# Altium PCB frm-voltrod.PcbDoc (part 1 of 2)
Units mm, origin at the board's own origin, x right, y up, seen from the top; angles counter-clockwise.
Board outline 80 x 200 mm, 2 copper layers (Top Layer, Bottom Layer), stack 1.56 mm thick; 234 components, 176 nets, 667 pads, 121 vias.
Unrouted connection lines stored in the file: 240.
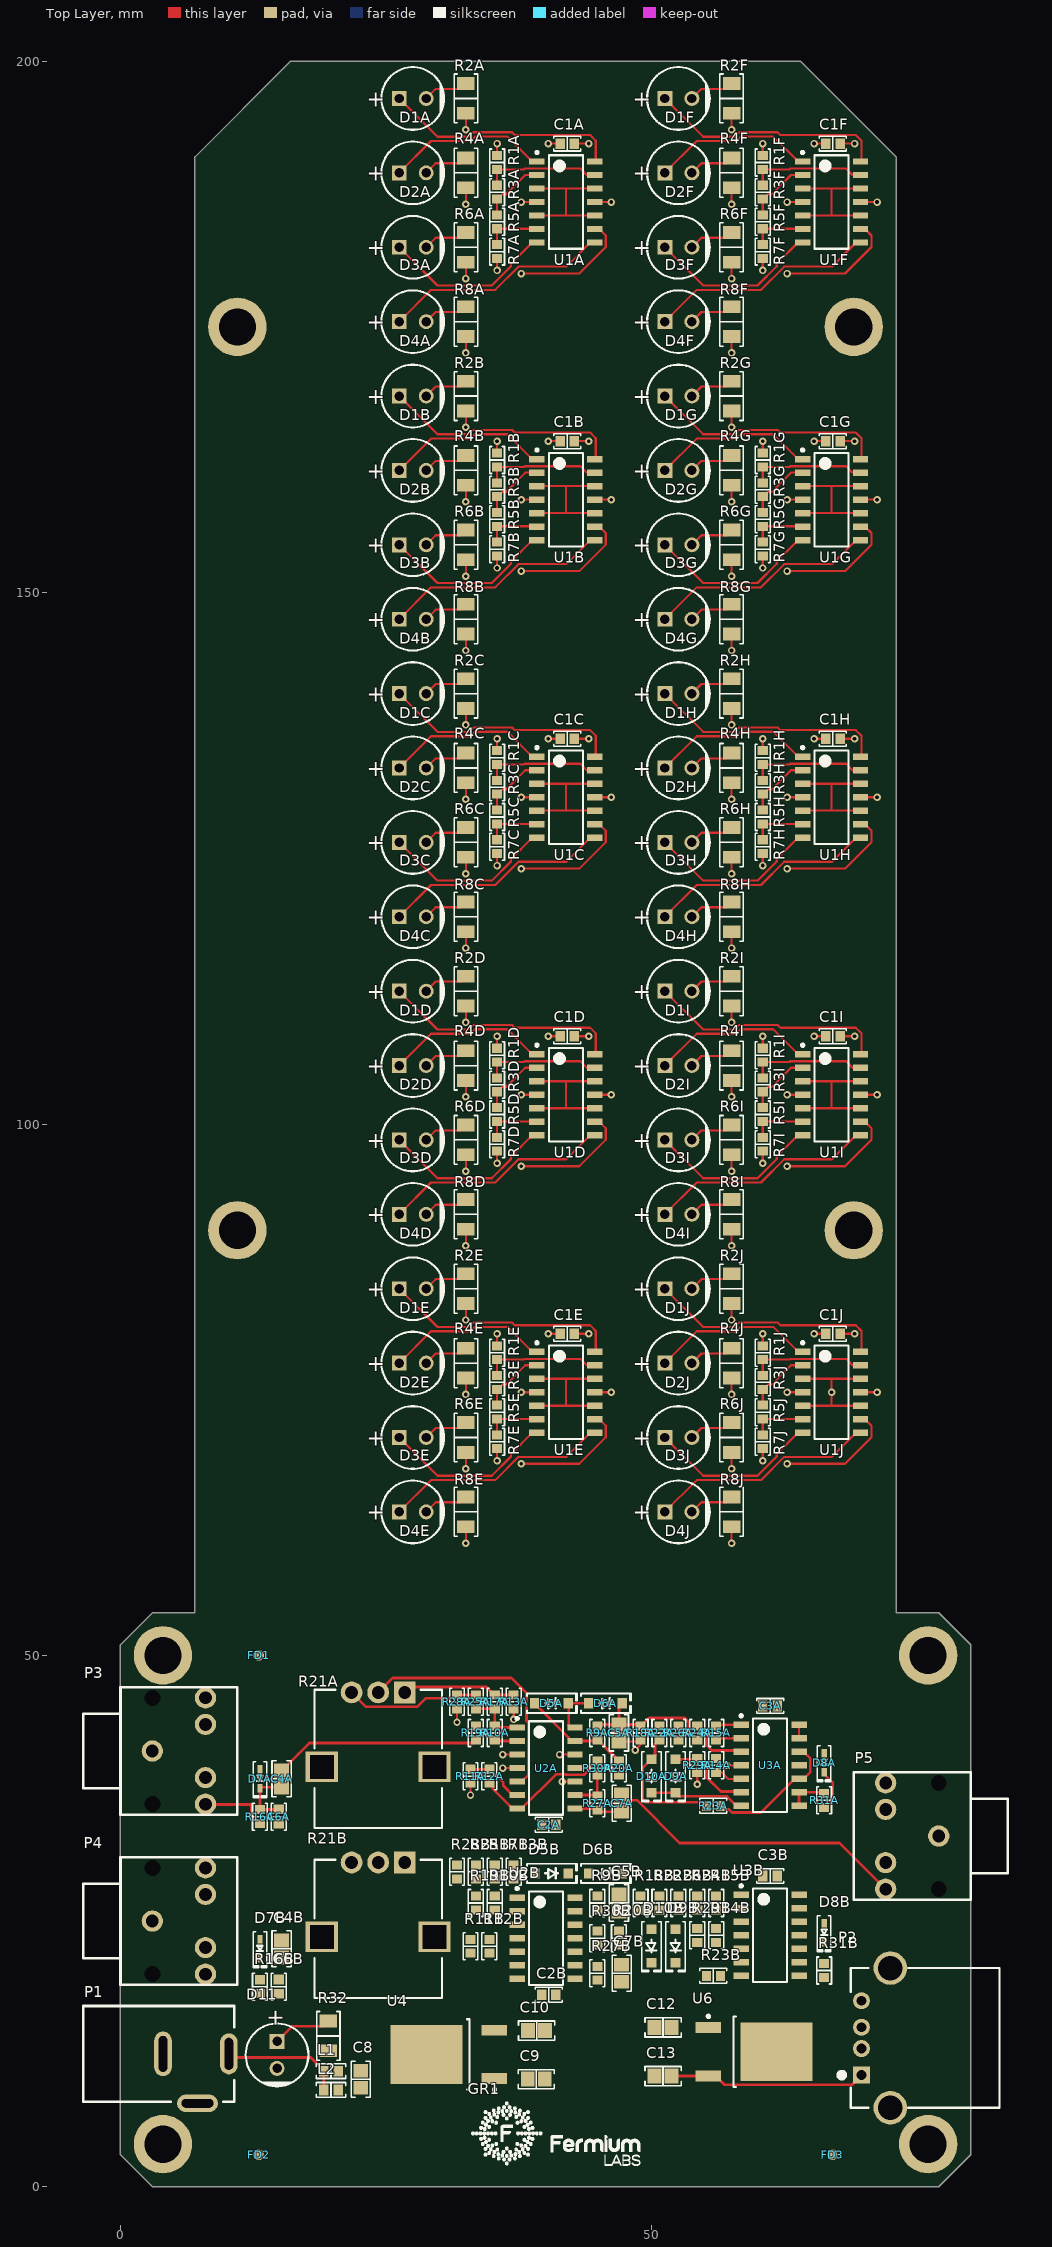
[diagram p0: Top Layer view]
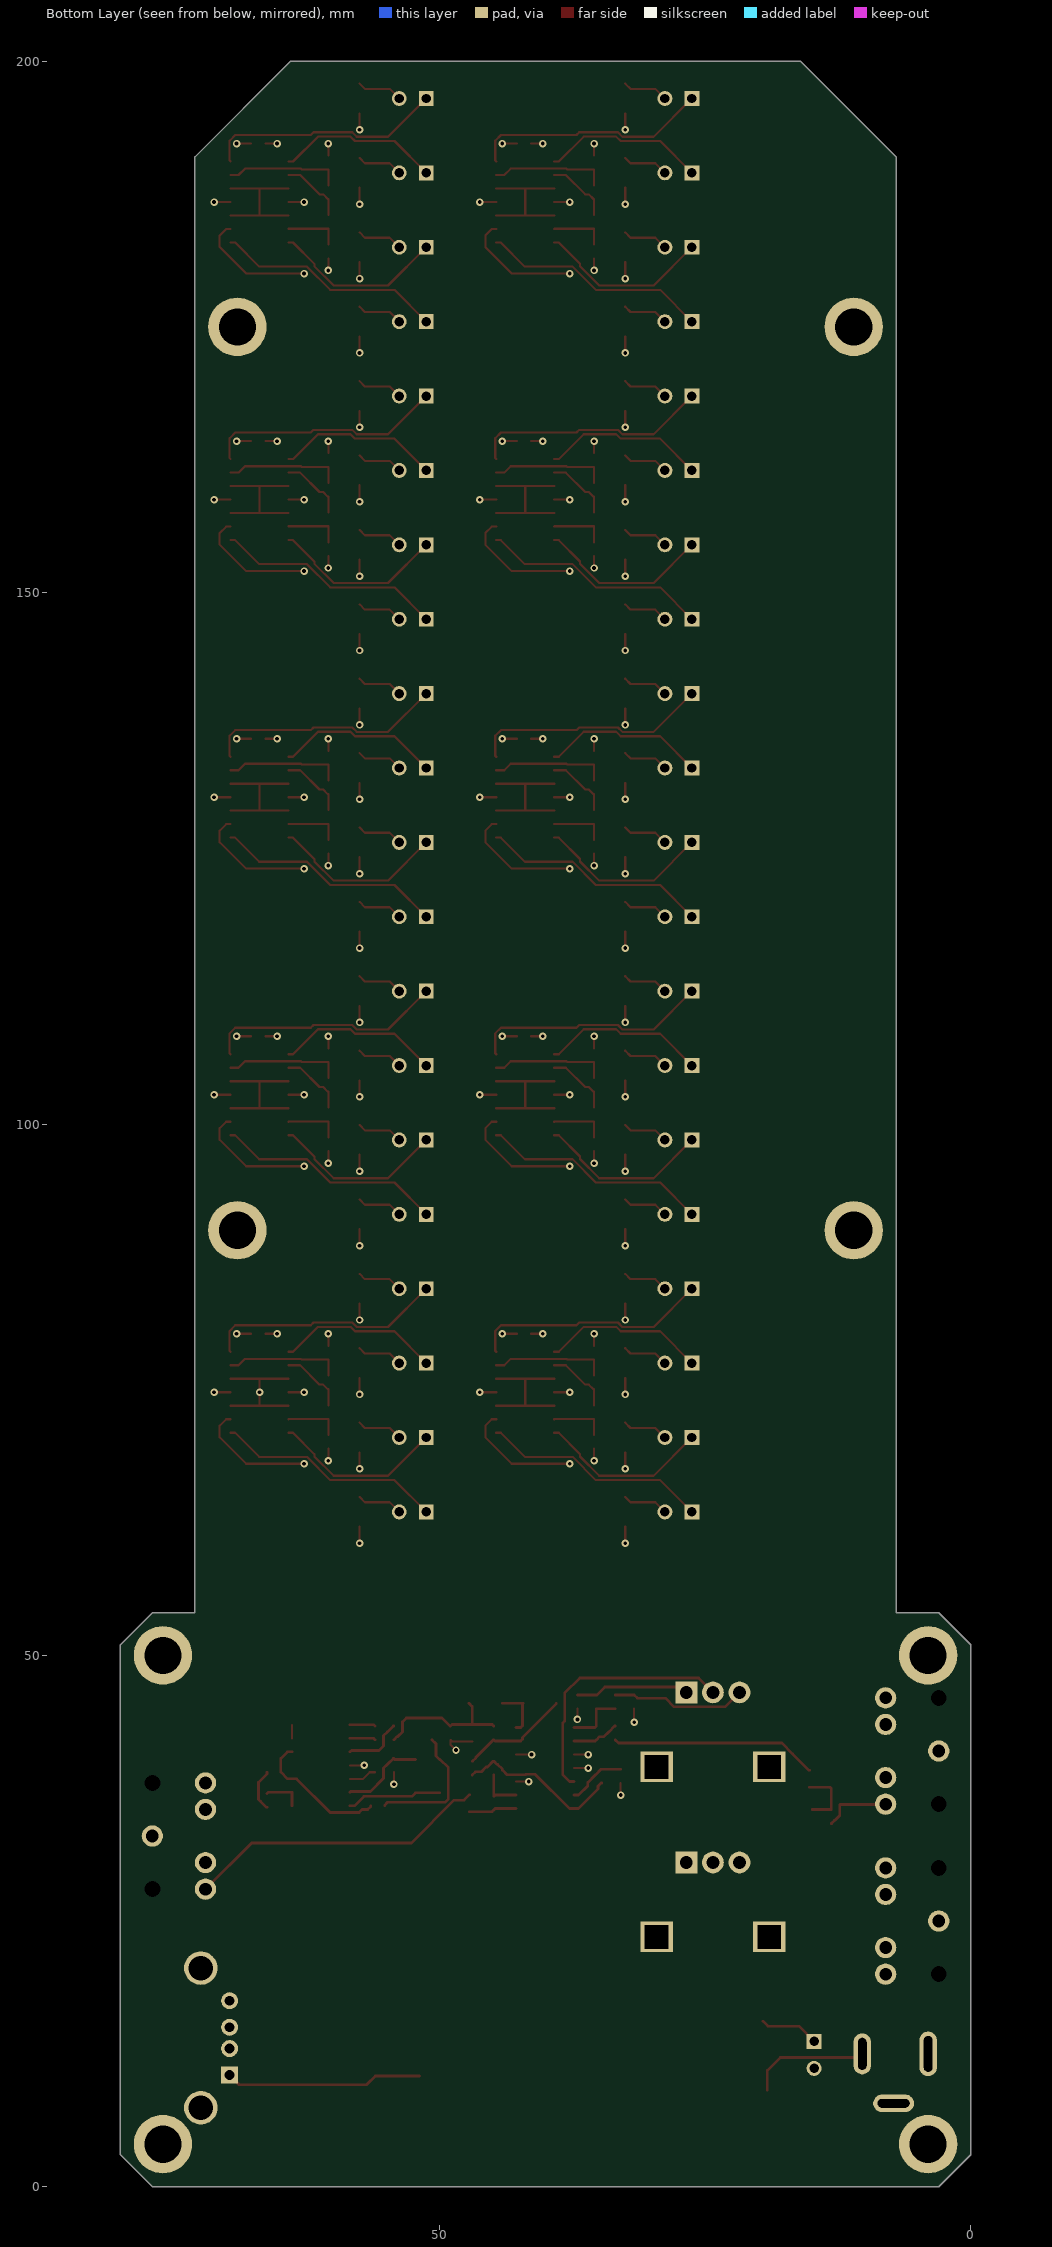
[diagram p1: Bottom Layer view, seen from below]
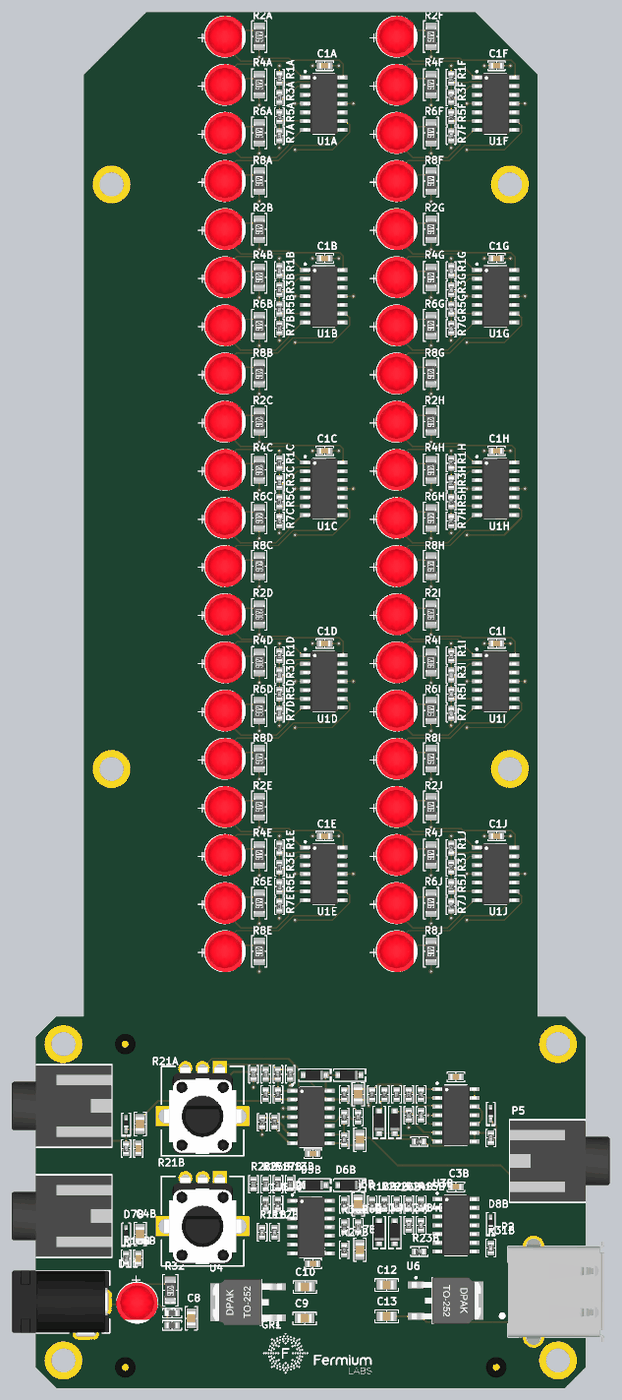
[diagram p3: 3D render of the assembled board from above, using the file's embedded part models]

## Layer stack, top to bottom
Top Solder: solder mask 0.02, Solder Resist, Dk 3.5
Top Layer: signal copper 0.03
Dielectric 1: dielectric 1.5, FR-4, Dk 4.8
Bottom Layer: signal copper 0.03
Bottom Solder: solder mask 0.02, Solder Resist, Dk 3.5

## Board outline
0,3 0,51 3,54 7,54 7,191 16,200 64,200 73,191 73,54 77,54 80,51 80,3 77,0 3,0

## Design rules (kind name [scope] priority, off if disabled: settings)
AcuteAngle [All] p1: minimum=6.00000000000000E+0001 checktracksonly=TRUE
AssemblyTestPointUsage [(not InNetClass('NOTESTPOINTS'))] p1: allowmultiple=TRUE
AssemblyTestPointUsage AssemblyTestPointUsageN [InNetClass('NOTESTPOINTS')] p2: valid=2 allowmultiple=TRUE
AssemblyTestpoint [All] p1: testpointundercomponent=TRUE minsize=0.8 maxsize=2 preferedsize=1 minholesize=0 maxholesize=0.35 preferedholesize=0 testpointgrid=1.27 usegrid=FALSE gridoriginx=87.5 gridoriginy=62.5 gridtolerance=0 allowsidetop=TRUE minspacing=2.54 // Zollner
BoardOutlineClearance BoardCopperOutlineClearance [(OnLayer('Top Layer') OR OnLayer('Bottom Layer') )] p1: gap=0.5 ignorepadtopadclearanceinfootprint=FALSE except(1: Poly-OutlineEdge Region-OutlineEdge; 1.5: SMDPad-OutlineEdge THPad-OutlineEdge)
Clearance PadToViaClearance [IsVia and not IsComponentVia vs IsPad] p1: gap=0.025 ignorepadtopadclearanceinfootprint=TRUE
Clearance "Clearance NOTSELV-SELV" [InNetClass('NOTSELV') vs NOT InNetClass('NOTSELV')] p2: gap=6 ignorepadtopadclearanceinfootprint=FALSE // according to previous calio PCB
Clearance "Clearance (FAB)" [All] p3: gap=0.203 ignorepadtopadclearanceinfootprint=TRUE except(0.305: Arc-Poly Track-Poly SMDPad-Poly THPad-Poly Via-Poly Fill-Poly Poly-Poly)
ComponentClearance ComponentClearance_NetTie [((ObjectKind = 'Component') And (ComponentType = 'Net Tie')) Or (Footprint = 'StarPoint') Or (Footprint like 'NetTieVia*')] p1: gap=-3.81 collisioncheckmode=3 verticalgap=-3.81 showdistances=FALSE
ComponentClearance [All] p2: gap=0.254 collisioncheckmode=3 verticalgap=0.254 showdistances=FALSE
DiffPairsRouting [All] p1: maxlimit=1.27 minlimit=0.203 mostfreqgap=0.203 toplayer_minwidth=0.152 toplayer_maxwidth=2.54 toplayer_prefwidth=0.254 bottomlayer_minwidth=0.152 bottomlayer_maxwidth=2.54 bottomlayer_prefwidth=0.254 maxuncoupledlength=12.7
FabricationTestPointUsage [All] p1: valid=2 allowmultiple=FALSE
FabricationTestpoint [All] p1: side=3 testpointundercomponent=TRUE minsize=1.016 maxsize=2.54 preferedsize=1.524 minholesize=0 maxholesize=1.016 preferedholesize=0.813 testpointgrid=0.025 allowsidetop=TRUE allowsidebottom=TRUE usegrid=FALSE gridtolerance=0
HoleSize [All] p1: absolutevalues=TRUE maxlimit=6.35 minlimit=0.3 maxpercent=80.000 minpercent=20.000 // Zollner
HoleToHoleClearance HoleToHoleClearance_NetTieVia [InPadClass('NetTieVias') vs InPadClass('NetTieVias')] p1: gap=0 allowstackedmicrovias=TRUE
HoleToHoleClearance [All] p2: gap=0.25 allowstackedmicrovias=TRUE // Zollner
MinimumAnnularRing [All] p1: minimumring=0.15 // PCBWAY
MinimumSolderMaskSliver [All] p1: minsoldermaskwidth=0.2 // Zollner
PlaneClearance PlaneClearance_1 [All] p1: clearance=0.508
PlaneConnect [All] p1: pad.planeconnectstyle=Relief pad.reliefexpansion=0.508 pad.reliefentries=4 pad.reliefconductorwidth=0.254 pad.reliefairgap=0.254 via.planeconnectstyle=Direct via.reliefexpansion=0.508 via.reliefentries=4 via.reliefconductorwidth=0.254 via.reliefairgap=0.254
PolygonConnect [All] p1: thpad.connectstyle=Relief thpad.reliefconductorwidth=0.254 thpad.reliefentries=4 thpad.polygonreliefangle="90 Angle" thpad.airgapwidth=0.254 smdpad.connectstyle=Relief smdpad.reliefconductorwidth=0.254 smdpad.reliefentries=4 smdpad.polygonreliefangle="90 Angle" smdpad.airgapwidth=0.254 via.connectstyle=Direct via.reliefconductorwidth=0.254 via.reliefentries=4 via.polygonreliefangle="90 Angle" via.airgapwidth=0.254
RoomDefinition SCH3_5B [InComponentClass('SCH3_5B')] p1: confinementstyle=ConfineIn formatcopy=TRUE lockcomponents=FALSE outline 47.63,59.904 72.63,59.904 72.63,88.098 47.63,88.098
RoomDefinition SCH3_5A [InComponentClass('SCH3_5A')] p2: confinementstyle=ConfineIn formatcopy=TRUE lockcomponents=FALSE outline 22.63,59.904 47.63,59.904 47.63,88.098 22.63,88.098
RoomDefinition SCH3_4B [InComponentClass('SCH3_4B')] p3: confinementstyle=ConfineIn formatcopy=TRUE lockcomponents=FALSE outline 47.63,87.904 72.63,87.904 72.63,116.098 47.63,116.098
RoomDefinition SCH3_4A [InComponentClass('SCH3_4A')] p4: confinementstyle=ConfineIn formatcopy=TRUE lockcomponents=FALSE outline 22.63,87.904 47.63,87.904 47.63,116.098 22.63,116.098
RoomDefinition SCH3_3B [InComponentClass('SCH3_3B')] p5: confinementstyle=ConfineIn formatcopy=TRUE lockcomponents=FALSE outline 47.63,115.904 72.63,115.904 72.63,144.098 47.63,144.098
RoomDefinition SCH3_3A [InComponentClass('SCH3_3A')] p6: confinementstyle=ConfineIn formatcopy=TRUE lockcomponents=FALSE outline 22.63,115.904 47.63,115.904 47.63,144.098 22.63,144.098
RoomDefinition SCH3_2B [InComponentClass('SCH3_2B')] p7: confinementstyle=ConfineIn formatcopy=TRUE lockcomponents=FALSE outline 47.63,143.904 72.63,143.904 72.63,172.098 47.63,172.098
RoomDefinition SCH3_2A [InComponentClass('SCH3_2A')] p8: confinementstyle=ConfineIn formatcopy=TRUE lockcomponents=FALSE outline 22.63,143.904 47.63,143.904 47.63,172.098 22.63,172.098
RoomDefinition SCH3_1B [InComponentClass('SCH3_1B')] p9: confinementstyle=ConfineIn formatcopy=TRUE lockcomponents=FALSE outline 47.63,171.904 72.63,171.904 72.63,200.098 47.63,200.098
RoomDefinition SCH3_1A [InComponentClass('SCH3_1A')] p10: confinementstyle=ConfineIn formatcopy=TRUE lockcomponents=FALSE outline 22.63,171.904 47.63,171.904 47.63,200.098 22.63,200.098
RoomDefinition SCH2B [InComponentClass('SCH2B')] p11: confinementstyle=ConfineIn formatcopy=TRUE lockcomponents=FALSE outline 12,17.014 67.372,17.014 67.372,32 12,32
RoomDefinition SCH2A [InComponentClass('SCH2A')] p12: confinementstyle=ConfineIn formatcopy=TRUE lockcomponents=FALSE outline 12,33.014 67.372,33.014 67.372,48 12,48
RoutingVias [All] p1: holewidth=0.35 width=0.7 viastyle="Through Hole" minholewidth=0.3 minwidth=0.6 maxholewidth=1.27 maxwidth=1.27
SMDEntry [not IsTestpoint] p1: side=TRUE corner=TRUE anyangle=FALSE
SMDNeckDown [not IsTestpoint] p1: percent=90.000
SMDToCorner [All] p1: distance=10000
SMDToPlane [All] p1: distance=0
ShortCircuit [All vs not IsBoardCutoutRegion] p1: allowed=FALSE
SilkToSolderMaskClearance [IsPad] p1: minsilkscreentomaskgap=0.127 clearancetoexposedcopper=TRUE
SolderMaskExpansion [All] p1: expansion=0.05 // Zollner
SolderMaskExpansion SolderMaskExpansionToHoles [All] p2: expansion=0.1 soldermaskfromhole=TRUE // Zollner
UnRoutedNet [All] p1: checkbadconnections=TRUE
Width [All] p1: maxlimit=12.7 minlimit=0.203 preferedwidth=0.254
16 further rules are at their usual default settings.

## Classes and differential pairs
channel class frm-voltrod_channel: SCH1_1 SCH1_2
channel class frm-voltrod_AFE: SCH2A SCH2B
channel class frm-voltrod_4LED: SCH3_1A SCH3_1B SCH3_2A SCH3_2B SCH3_3A SCH3_3B SCH3_4A SCH3_4B SCH3_5A SCH3_5B
component class SCH3_5B: C1J D1J D2J D3J D4J R1J R2J R3J R4J R5J R6J R7J R8J U1J
component class SCH3_5A: C1E D1E D2E D3E D4E R1E R2E R3E R4E R5E R6E R7E R8E U1E
component class SCH3_4B: C1I D1I D2I D3I D4I R1I R2I R3I R4I R5I R6I R7I R8I U1I
component class SCH3_4A: C1D D1D D2D D3D D4D R1D R2D R3D R4D R5D R6D R7D R8D U1D
component class SCH3_3B: C1H D1H D2H D3H D4H R1H R2H R3H R4H R5H R6H R7H R8H U1H
component class SCH3_3A: C1C D1C D2C D3C D4C R1C R2C R3C R4C R5C R6C R7C R8C U1C
component class SCH3_2B: C1G D1G D2G D3G D4G R1G R2G R3G R4G R5G R6G R7G R8G U1G
component class SCH3_2A: C1B D1B D2B D3B D4B R1B R2B R3B R4B R5B R6B R7B R8B U1B
component class SCH3_1B: C1F D1F D2F D3F D4F R1F R2F R3F R4F R5F R6F R7F R8F U1F
component class SCH3_1A: C1A D1A D2A D3A D4A R1A R2A R3A R4A R5A R6A R7A R8A U1A
component class SCH2B: C2B C3B C4B C5B C6B C7B D5B D6B D7B D8B D9B D10B R9B R10B R11B R12B R13B R14B R15B R16B R17B R18B R19B R20B R21B R22B R23B R24B R25B R26B R27B R28B R29B R30B R31B U2B U3B
component class SCH2A: C2A C3A C4A C5A C6A C7A D5A D6A D7A D8A D9A D10A R9A R10A R11A R12A R13A R14A R15A R16A R17A R18A R19A R20A R21A R22A R23A R24A R25A R26A R27A R28A R29A R30A R31A U2A U3A
component class frm-voltrod_main: C8 C9 C10 C12 C13 D11 FD1 FD2 FD3 GR1 L1 L2 P1 P2 P3 P4 P5 R32 TP1 TP2 TP3 TP4 U4 U6

## Components (designator, comment, footprint, x,y, rotation, side; value= is the part's Value field where it differs from the comment)
C1A "100nF" "CAP 0603_1608" 42.042,192.256 r0 top (schematic designator C1)
C1B "100nF" "CAP 0603_1608" 42.042,164.256 r0 top (schematic designator C1)
C1C "100nF" "CAP 0603_1608" 42.042,136.256 r0 top (schematic designator C1)
C1D "100nF" "CAP 0603_1608" 42.042,108.256 r0 top (schematic designator C1)
C1E "100nF" "CAP 0603_1608" 42.042,80.256 r0 top (schematic designator C1)
C1F "100nF" "CAP 0603_1608" 67.042,192.256 r0 top (schematic designator C1)
C1G "100nF" "CAP 0603_1608" 67.042,164.256 r0 top (schematic designator C1)
C1H "100nF" "CAP 0603_1608" 67.042,136.256 r0 top (schematic designator C1)
C1I "100nF" "CAP 0603_1608" 67.042,108.256 r0 top (schematic designator C1)
C1J "100nF" "CAP 0603_1608" 67.042,80.256 r0 top (schematic designator C1)
C2A "100nF" "CAP 0603_1608" 40.302,34.062 r0 top (schematic designator C2)
C2B "100nF" "CAP 0603_1608" 40.302,18.062 r0 top (schematic designator C2)
C3A "100nF" "CAP 0603_1608" 61.13,45.238 r0 top (schematic designator C3)
C3B "100nF" "CAP 0603_1608" 61.13,29.238 r0 top (schematic designator C3)
C4A "10uF" "CAP 0805_2012" 15.156,38.38 r90 top (schematic designator C4)
C4B "10uF" "CAP 0805_2012" 15.156,22.38 r90 top (schematic designator C4)
C5A "10uF" "CAP 0805_2012" 46.906,42.698 r270 top (schematic designator C5)
C5B "10uF" "CAP 0805_2012" 46.906,26.698 r270 top (schematic designator C5)
C6A "1nF" "CAP 0603_1608" 14.902,34.824 r270 top (schematic designator C6)
C6B "1nF" "CAP 0603_1608" 14.902,18.824 r270 top (schematic designator C6)
C7A "10uF" "CAP 0805_2012" 47.16,36.094 r90 top (schematic designator C7)
C7B "10uF" "CAP 0805_2012" 47.16,20.094 r90 top (schematic designator C7)
C8 "10uF" "CAP 0805_2012" 22.606,10.12 r90 top
C9 "10uF" "CAP 0805_2012" 39.116,10.12 r0 top
C10 "10uF" "CAP 0805_2012" 39.154,14.692 r0 top
C12 "10uF" "CAP 0805_2012" 51.054,14.986 r180 top
C13 "10uF" "CAP 0805_2012" 51.054,10.414 r180 top
D1A "RED 200mcd" ED49B4F6-595F-4D62-96BB-D7184CAA9B94 27.5,196.5 r0 top (schematic designator D1)
D1B "RED 200mcd" ED49B4F6-595F-4D62-96BB-D7184CAA9B94 27.5,168.5 r0 top (schematic designator D1)
D1C "RED 200mcd" ED49B4F6-595F-4D62-96BB-D7184CAA9B94 27.5,140.5 r0 top (schematic designator D1)
D1D "RED 200mcd" ED49B4F6-595F-4D62-96BB-D7184CAA9B94 27.5,112.5 r0 top (schematic designator D1)
D1E "RED 200mcd" ED49B4F6-595F-4D62-96BB-D7184CAA9B94 27.5,84.5 r0 top (schematic designator D1)
D1F "RED 200mcd" ED49B4F6-595F-4D62-96BB-D7184CAA9B94 52.5,196.5 r0 top (schematic designator D1)
D1G "RED 200mcd" ED49B4F6-595F-4D62-96BB-D7184CAA9B94 52.5,168.5 r0 top (schematic designator D1)
D1H "RED 200mcd" ED49B4F6-595F-4D62-96BB-D7184CAA9B94 52.5,140.5 r0 top (schematic designator D1)
D1I "RED 200mcd" ED49B4F6-595F-4D62-96BB-D7184CAA9B94 52.5,112.5 r0 top (schematic designator D1)
D1J "RED 200mcd" ED49B4F6-595F-4D62-96BB-D7184CAA9B94 52.5,84.5 r0 top (schematic designator D1)
D2A "RED 200mcd" ED49B4F6-595F-4D62-96BB-D7184CAA9B94 27.5,189.5 r0 top (schematic designator D2)
D2B "RED 200mcd" ED49B4F6-595F-4D62-96BB-D7184CAA9B94 27.5,161.5 r0 top (schematic designator D2)
D2C "RED 200mcd" ED49B4F6-595F-4D62-96BB-D7184CAA9B94 27.5,133.5 r0 top (schematic designator D2)
D2D "RED 200mcd" ED49B4F6-595F-4D62-96BB-D7184CAA9B94 27.5,105.5 r0 top (schematic designator D2)
D2E "RED 200mcd" ED49B4F6-595F-4D62-96BB-D7184CAA9B94 27.5,77.5 r0 top (schematic designator D2)
D2F "RED 200mcd" ED49B4F6-595F-4D62-96BB-D7184CAA9B94 52.5,189.5 r0 top (schematic designator D2)
D2G "RED 200mcd" ED49B4F6-595F-4D62-96BB-D7184CAA9B94 52.5,161.5 r0 top (schematic designator D2)
D2H "RED 200mcd" ED49B4F6-595F-4D62-96BB-D7184CAA9B94 52.5,133.5 r0 top (schematic designator D2)
D2I "RED 200mcd" ED49B4F6-595F-4D62-96BB-D7184CAA9B94 52.5,105.5 r0 top (schematic designator D2)
D2J "RED 200mcd" ED49B4F6-595F-4D62-96BB-D7184CAA9B94 52.5,77.5 r0 top (schematic designator D2)
D3A "RED 200mcd" ED49B4F6-595F-4D62-96BB-D7184CAA9B94 27.5,182.5 r0 top (schematic designator D3)
D3B "RED 200mcd" ED49B4F6-595F-4D62-96BB-D7184CAA9B94 27.5,154.5 r0 top (schematic designator D3)
D3C "RED 200mcd" ED49B4F6-595F-4D62-96BB-D7184CAA9B94 27.5,126.5 r0 top (schematic designator D3)
D3D "RED 200mcd" ED49B4F6-595F-4D62-96BB-D7184CAA9B94 27.5,98.5 r0 top (schematic designator D3)
D3E "RED 200mcd" ED49B4F6-595F-4D62-96BB-D7184CAA9B94 27.5,70.5 r0 top (schematic designator D3)
D3F "RED 200mcd" ED49B4F6-595F-4D62-96BB-D7184CAA9B94 52.5,182.5 r0 top (schematic designator D3)
D3G "RED 200mcd" ED49B4F6-595F-4D62-96BB-D7184CAA9B94 52.5,154.5 r0 top (schematic designator D3)
D3H "RED 200mcd" ED49B4F6-595F-4D62-96BB-D7184CAA9B94 52.5,126.5 r0 top (schematic designator D3)
D3I "RED 200mcd" ED49B4F6-595F-4D62-96BB-D7184CAA9B94 52.5,98.5 r0 top (schematic designator D3)
D3J "RED 200mcd" ED49B4F6-595F-4D62-96BB-D7184CAA9B94 52.5,70.5 r0 top (schematic designator D3)
D4A "RED 200mcd" ED49B4F6-595F-4D62-96BB-D7184CAA9B94 27.5,175.5 r0 top (schematic designator D4)
D4B "RED 200mcd" ED49B4F6-595F-4D62-96BB-D7184CAA9B94 27.5,147.5 r0 top (schematic designator D4)
D4C "RED 200mcd" ED49B4F6-595F-4D62-96BB-D7184CAA9B94 27.5,119.5 r0 top (schematic designator D4)
D4D "RED 200mcd" ED49B4F6-595F-4D62-96BB-D7184CAA9B94 27.5,91.5 r0 top (schematic designator D4)
D4E "RED 200mcd" ED49B4F6-595F-4D62-96BB-D7184CAA9B94 27.5,63.5 r0 top (schematic designator D4)
D4F "RED 200mcd" ED49B4F6-595F-4D62-96BB-D7184CAA9B94 52.5,175.5 r0 top (schematic designator D4)
D4G "RED 200mcd" ED49B4F6-595F-4D62-96BB-D7184CAA9B94 52.5,147.5 r0 top (schematic designator D4)
D4H "RED 200mcd" ED49B4F6-595F-4D62-96BB-D7184CAA9B94 52.5,119.5 r0 top (schematic designator D4)
D4I "RED 200mcd" ED49B4F6-595F-4D62-96BB-D7184CAA9B94 52.5,91.5 r0 top (schematic designator D4)
D4J "RED 200mcd" ED49B4F6-595F-4D62-96BB-D7184CAA9B94 52.5,63.5 r0 top (schematic designator D4)
D5A "1N4148W-TP" SOD-123 40.556,45.492 r0 top (schematic designator D5)
D5B "1N4148W-TP" SOD-123 40.556,29.492 r0 top (schematic designator D5)
D6A "1N4148W-TP" SOD-123 45.636,45.492 r0 top (schematic designator D6)
D6B "1N4148W-TP" SOD-123 45.636,29.492 r0 top (schematic designator D6)
D7A "3.3V" SOD523F 13.124,38.38 r270 top (schematic designator D7)
D7B "3.3V" SOD523F 13.124,22.38 r270 top (schematic designator D7)
D8A "5V" SOD523F 66.21,39.904 r270 top (schematic designator D8)
D8B "5V" SOD523F 66.21,23.904 r270 top (schematic designator D8)
D9A "1N4148W-TP" SOD-123 52.24,38.634 r270 top (schematic designator D9)
D9B "1N4148W-TP" SOD-123 52.24,22.634 r270 top (schematic designator D9)
D10A "1N4148W-TP" SOD-123 49.954,38.634 r270 top (schematic designator D10)
D10B "1N4148W-TP" SOD-123 49.954,22.634 r270 top (schematic designator D10)
D11 "RED 200mcd" ED49B4F6-595F-4D62-96BB-D7184CAA9B94 14.732,12.406 r270 top
FD1 "IPC-7351A FIDUCIAL" FIDUCIAL-IPC-7351A 13,50 r0 top
FD2 "IPC-7351A FIDUCIAL" FIDUCIAL-IPC-7351A 13,3 r0 top
FD3 "IPC-7351A FIDUCIAL" FIDUCIAL-IPC-7351A 67,3 r0 top
GR1 "FermiumLABS logo" 5394DE47-A0E8-4329-8464-7791B7C19310 33,2 r0 top
L1 "MPZ1608S102ATA00" "FER 0603_1608" 19.812,10.882 r0 top
L2 "MPZ1608S102ATA00" "FER 0603_1608" 19.812,9.104 r0 top
P1 "DC-005A-20A" F0972D8A-C5C0-4A84-836D-A9666EE65C2D 10.2,12.5 r0 top
P2 "292303-1" 8A51F738-712D-4EE5-9D6B-BB16603F834E 71,14 r90 top
P3 "PJ-3900-04" 7EF2B92C-0FC9-4C85-B662-5CEC65BFCCC4 3,41 r0 top
P4 "PJ-3900-04" 7EF2B92C-0FC9-4C85-B662-5CEC65BFCCC4 3,25 r0 top
P5 "PJ-3900-04" 7EF2B92C-0FC9-4C85-B662-5CEC65BFCCC4 77,33 r180 top
R1A "1K" "RES 0603_1608" 35.438,190.478 r270 top (schematic designator R1)
R1B "1K" "RES 0603_1608" 35.438,162.478 r270 top (schematic designator R1)
R1C "1K" "RES 0603_1608" 35.438,134.478 r270 top (schematic designator R1)
R1D "1K" "RES 0603_1608" 35.438,106.478 r270 top (schematic designator R1)
R1E "1K" "RES 0603_1608" 35.438,78.478 r270 top (schematic designator R1)
R1F "1K" "RES 0603_1608" 60.438,190.478 r270 top (schematic designator R1)
R1G "1K" "RES 0603_1608" 60.438,162.478 r270 top (schematic designator R1)
R1H "1K" "RES 0603_1608" 60.438,134.478 r270 top (schematic designator R1)
R1I "1K" "RES 0603_1608" 60.438,106.478 r270 top (schematic designator R1)
R1J "1K" "RES 0603_1608" 60.438,78.478 r270 top (schematic designator R1)
R2A "499" "RES 1206_3216" 32.5,196.5 r270 top (schematic designator R2)
R2B "499" "RES 1206_3216" 32.5,168.5 r270 top (schematic designator R2)
R2C "499" "RES 1206_3216" 32.5,140.5 r270 top (schematic designator R2)
R2D "499" "RES 1206_3216" 32.5,112.5 r270 top (schematic designator R2)
R2E "499" "RES 1206_3216" 32.5,84.5 r270 top (schematic designator R2)
R2F "499" "RES 1206_3216" 57.5,196.5 r270 top (schematic designator R2)
R2G "499" "RES 1206_3216" 57.5,168.5 r270 top (schematic designator R2)
R2H "499" "RES 1206_3216" 57.5,140.5 r270 top (schematic designator R2)
R2I "499" "RES 1206_3216" 57.5,112.5 r270 top (schematic designator R2)
R2J "499" "RES 1206_3216" 57.5,84.5 r270 top (schematic designator R2)
R3A "1K" "RES 0603_1608" 35.438,187.684 r270 top (schematic designator R3)
R3B "1K" "RES 0603_1608" 35.438,159.684 r270 top (schematic designator R3)
R3C "1K" "RES 0603_1608" 35.438,131.684 r270 top (schematic designator R3)
R3D "1K" "RES 0603_1608" 35.438,103.684 r270 top (schematic designator R3)
R3E "1K" "RES 0603_1608" 35.438,75.684 r270 top (schematic designator R3)
R3F "1K" "RES 0603_1608" 60.438,187.684 r270 top (schematic designator R3)
R3G "1K" "RES 0603_1608" 60.438,159.684 r270 top (schematic designator R3)
R3H "1K" "RES 0603_1608" 60.438,131.684 r270 top (schematic designator R3)
R3I "1K" "RES 0603_1608" 60.438,103.684 r270 top (schematic designator R3)
R3J "1K" "RES 0603_1608" 60.438,75.684 r270 top (schematic designator R3)
R4A "499" "RES 1206_3216" 32.5,189.5 r270 top (schematic designator R4)
R4B "499" "RES 1206_3216" 32.5,161.5 r270 top (schematic designator R4)
R4C "499" "RES 1206_3216" 32.5,133.5 r270 top (schematic designator R4)
R4D "499" "RES 1206_3216" 32.5,105.5 r270 top (schematic designator R4)
R4E "499" "RES 1206_3216" 32.5,77.5 r270 top (schematic designator R4)
R4F "499" "RES 1206_3216" 57.5,189.5 r270 top (schematic designator R4)
R4G "499" "RES 1206_3216" 57.5,161.5 r270 top (schematic designator R4)
R4H "499" "RES 1206_3216" 57.5,133.5 r270 top (schematic designator R4)
R4I "499" "RES 1206_3216" 57.5,105.5 r270 top (schematic designator R4)
R4J "499" "RES 1206_3216" 57.5,77.5 r270 top (schematic designator R4)
R5A "1K" "RES 0603_1608" 35.438,184.89 r270 top (schematic designator R5)
R5B "1K" "RES 0603_1608" 35.438,156.89 r270 top (schematic designator R5)
R5C "1K" "RES 0603_1608" 35.438,128.89 r270 top (schematic designator R5)
R5D "1K" "RES 0603_1608" 35.438,100.89 r270 top (schematic designator R5)
R5E "1K" "RES 0603_1608" 35.438,72.89 r270 top (schematic designator R5)
R5F "1K" "RES 0603_1608" 60.438,184.89 r270 top (schematic designator R5)
R5G "1K" "RES 0603_1608" 60.438,156.89 r270 top (schematic designator R5)
R5H "1K" "RES 0603_1608" 60.438,128.89 r270 top (schematic designator R5)
R5I "1K" "RES 0603_1608" 60.438,100.89 r270 top (schematic designator R5)
R5J "1K" "RES 0603_1608" 60.438,72.89 r270 top (schematic designator R5)
R6A "499" "RES 1206_3216" 32.5,182.5 r270 top (schematic designator R6)
R6B "499" "RES 1206_3216" 32.5,154.5 r270 top (schematic designator R6)
R6C "499" "RES 1206_3216" 32.5,126.5 r270 top (schematic designator R6)
R6D "499" "RES 1206_3216" 32.5,98.5 r270 top (schematic designator R6)
R6E "499" "RES 1206_3216" 32.5,70.5 r270 top (schematic designator R6)
R6F "499" "RES 1206_3216" 57.5,182.5 r270 top (schematic designator R6)
R6G "499" "RES 1206_3216" 57.5,154.5 r270 top (schematic designator R6)
R6H "499" "RES 1206_3216" 57.5,126.5 r270 top (schematic designator R6)
R6I "499" "RES 1206_3216" 57.5,98.5 r270 top (schematic designator R6)
R6J "499" "RES 1206_3216" 57.5,70.5 r270 top (schematic designator R6)
R7A "1K" "RES 0603_1608" 35.438,182.096 r270 top (schematic designator R7)
R7B "1K" "RES 0603_1608" 35.438,154.096 r270 top (schematic designator R7)
R7C "1K" "RES 0603_1608" 35.438,126.096 r270 top (schematic designator R7)
R7D "1K" "RES 0603_1608" 35.438,98.096 r270 top (schematic designator R7)
R7E "1K" "RES 0603_1608" 35.438,70.096 r270 top (schematic designator R7)
R7F "1K" "RES 0603_1608" 60.438,182.096 r270 top (schematic designator R7)
R7G "1K" "RES 0603_1608" 60.438,154.096 r270 top (schematic designator R7)
R7H "1K" "RES 0603_1608" 60.438,126.096 r270 top (schematic designator R7)
R7I "1K" "RES 0603_1608" 60.438,98.096 r270 top (schematic designator R7)
R7J "1K" "RES 0603_1608" 60.438,70.096 r270 top (schematic designator R7)
R8A "499" "RES 1206_3216" 32.5,175.5 r270 top (schematic designator R8)
R8B "499" "RES 1206_3216" 32.5,147.5 r270 top (schematic designator R8)
R8C "499" "RES 1206_3216" 32.5,119.5 r270 top (schematic designator R8)
R8D "499" "RES 1206_3216" 32.5,91.5 r270 top (schematic designator R8)
R8E "499" "RES 1206_3216" 32.5,63.5 r270 top (schematic designator R8)
R8F "499" "RES 1206_3216" 57.5,175.5 r270 top (schematic designator R8)
R8G "499" "RES 1206_3216" 57.5,147.5 r270 top (schematic designator R8)
R8H "499" "RES 1206_3216" 57.5,119.5 r270 top (schematic designator R8)
R8I "499" "RES 1206_3216" 57.5,91.5 r270 top (schematic designator R8)
R8J "499" "RES 1206_3216" 57.5,63.5 r270 top (schematic designator R8)
R9A "100K" "RES 0603_1608" 44.874,42.698 r90 top (schematic designator R9)
R9B "100K" "RES 0603_1608" 44.874,26.698 r90 top (schematic designator R9)
R10A "10K" "RES 0603_1608" 35.222,42.698 r90 top (schematic designator R10)
R10B "10K" "RES 0603_1608" 35.222,26.698 r90 top (schematic designator R10)
R11A "1K" "RES 0603_1608" 32.936,38.634 r270 top (schematic designator R11)
R11B "1K" "RES 0603_1608" 32.936,22.634 r270 top (schematic designator R11)
R12A "100K" "RES 0603_1608" 34.714,38.634 r270 top (schematic designator R12)
R12B "100K" "RES 0603_1608" 34.714,22.634 r270 top (schematic designator R12)
R13A "0" "RES 0603_1608" 37,45.624 r90 top (schematic designator R13)
R13B "0" "RES 0603_1608" 37,29.624 r90 top (schematic designator R13)
R14A "10K" "RES 0603_1608" 56.05,39.65 r90 top (schematic designator R14)
R14B "10K" "RES 0603_1608" 56.05,23.65 r90 top (schematic designator R14)
R15A "10K" "RES 0603_1608" 56.05,42.698 r90 top (schematic designator R15)
R15B "10K" "RES 0603_1608" 56.05,26.698 r90 top (schematic designator R15)
R16A "1K" "RES 0603_1608" 13.124,34.824 r270 top (schematic designator R16)
R16B "1K" "RES 0603_1608" 13.124,18.824 r270 top (schematic designator R16)
R17A "0" "RES 0603_1608" 35.222,45.624 r90 top (schematic designator R17)
R17B "0" "RES 0603_1608" 35.222,29.624 r90 top (schematic designator R17)
R18A "100K" "RES 0603_1608" 48.938,42.698 r90 top (schematic designator R18)
R18B "100K" "RES 0603_1608" 48.938,26.698 r90 top (schematic designator R18)
R19A "10K" "RES 0603_1608" 33.444,42.698 r90 top (schematic designator R19)
R19B "10K" "RES 0603_1608" 33.444,26.698 r90 top (schematic designator R19)
R20A "100K" "RES 0603_1608" 46.906,39.396 r90 top (schematic designator R20)
R20B "100K" "RES 0603_1608" 46.906,23.396 r90 top (schematic designator R20)
R21A "10K LIN" 2EF88547-EDEF-4A49-A522-C215618D4BC7 24.25,46.512 r180 top (schematic designator R21)
R21B "10K LIN" 2EF88547-EDEF-4A49-A522-C215618D4BC7 24.25,30.512 r180 top (schematic designator R21)
R22A "1K" "RES 0603_1608" 50.716,42.698 r90 top (schematic designator R22)
R22B "1K" "RES 0603_1608" 50.716,26.698 r90 top (schematic designator R22)
R23A "1K" "RES 0603_1608" 55.796,35.84 r180 top (schematic designator R23)
R23B "1K" "RES 0603_1608" 55.796,19.84 r180 top (schematic designator R23)
R24A "10K" "RES 0603_1608" 54.272,42.698 r90 top (schematic designator R24)
R24B "10K" "RES 0603_1608" 54.272,26.698 r90 top (schematic designator R24)
R25A "0" "RES 0603_1608" 33.444,45.624 r90 top (schematic designator R25)
R25B "0" "RES 0603_1608" 33.444,29.624 r90 top (schematic designator R25)
R26A "10K" "RES 0603_1608" 52.494,42.698 r270 top (schematic designator R26)
R26B "10K" "RES 0603_1608" 52.494,26.698 r270 top (schematic designator R26)
R27A "10K" "RES 0603_1608" 44.874,36.094 r270 top (schematic designator R27)
R27B "10K" "RES 0603_1608" 44.874,20.094 r270 top (schematic designator R27)
R28A "0" "RES 0603_1608" 31.666,45.624 r90 top (schematic designator R28)
R28B "0" "RES 0603_1608" 31.666,29.624 r90 top (schematic designator R28)
R29A "1K" "RES 0603_1608" 54.272,39.65 r270 top (schematic designator R29)
R29B "1K" "RES 0603_1608" 54.272,23.65 r270 top (schematic designator R29)
R30A "100K" "RES 0603_1608" 44.874,39.396 r270 top (schematic designator R30)
R30B "100K" "RES 0603_1608" 44.874,23.396 r270 top (schematic designator R30)
R31A "1K" "RES 0603_1608" 66.21,36.348 r90 top (schematic designator R31)
R31B "1K" "RES 0603_1608" 66.21,20.348 r90 top (schematic designator R31)
R32 "499" "RES 1206_3216" 19.558,14.184 r270 top
U1A "LM324DT" 34355DA5-B1DA-47C2-A88A-ECF82120A4F7 41.912,186.754 r0 top (schematic designator U1)
U1B "LM324DT" 34355DA5-B1DA-47C2-A88A-ECF82120A4F7 41.912,158.754 r0 top (schematic designator U1)
U1C "LM324DT" 34355DA5-B1DA-47C2-A88A-ECF82120A4F7 41.912,130.754 r0 top (schematic designator U1)
U1D "LM324DT" 34355DA5-B1DA-47C2-A88A-ECF82120A4F7 41.912,102.754 r0 top (schematic designator U1)
U1E "LM324DT" 34355DA5-B1DA-47C2-A88A-ECF82120A4F7 41.912,74.754 r0 top (schematic designator U1)
U1F "LM324DT" 34355DA5-B1DA-47C2-A88A-ECF82120A4F7 66.912,186.754 r0 top (schematic designator U1)
U1G "LM324DT" 34355DA5-B1DA-47C2-A88A-ECF82120A4F7 66.912,158.754 r0 top (schematic designator U1)
U1H "LM324DT" 34355DA5-B1DA-47C2-A88A-ECF82120A4F7 66.912,130.754 r0 top (schematic designator U1)
U1I "LM324DT" 34355DA5-B1DA-47C2-A88A-ECF82120A4F7 66.912,102.754 r0 top (schematic designator U1)
U1J "LM324DT" 34355DA5-B1DA-47C2-A88A-ECF82120A4F7 66.912,74.754 r0 top (schematic designator U1)
U2A "LM324DT" 34355DA5-B1DA-47C2-A88A-ECF82120A4F7 40.048,39.396 r0 top (schematic designator U2)
U2B "LM324DT" 34355DA5-B1DA-47C2-A88A-ECF82120A4F7 40.048,23.396 r0 top (schematic designator U2)
U3A "LM324DT" 34355DA5-B1DA-47C2-A88A-ECF82120A4F7 61.13,39.65 r0 top (schematic designator U3)
U3B "LM324DT" 34355DA5-B1DA-47C2-A88A-ECF82120A4F7 61.13,23.65 r0 top (schematic designator U3)
U4 "L78M05ABDT-TR" 4BDA507D-BB70-4009-B963-85AD90086B51 30.892,12.458 r180 top
U6 "L78M05ABDT-TR" 4BDA507D-BB70-4009-B963-85AD90086B51 59.622,12.7 r0 top

## Footprints (in the part's own frame and the unit in brackets; to place one, negate y for a bottom-side part, rotate by r counter-clockwise, add the part's x,y. Pads: shape width x height; smd on the part's side, far side on the other; paste and mask are expansions set on the pad)
2EF88547-EDEF-4A49-A522-C215618D4BC7 [mm]
  rect 2.05x2.05 hole 1.2: 1(-2.5,0)
  round 2.05 hole 1.2: 2(0,0) 3(2.5,0)
  rect 3.05x2.85 hole 2.2 square: 4(-5.3,7) 4(5.3,7)
  silkscreen extent -6,-0.25 6,12.75, body extent -5.7,-0.15 5.7,12.5, height 14.89
4BDA507D-BB70-4009-B963-85AD90086B51 [mm]
  rect 2.4x1 smd: 1(-4.3,2.28) 3(-4.3,-2.28)
  rect 6.8x5.55 smd: 4(2.1,0)
  silkscreen extent -4.43,-3.3 -1.7,3.45, body extent -4.95,-3.37 5.15,3.37, height 2.37
7EF2B92C-0FC9-4C85-B662-5CEC65BFCCC4 [mm]
  round 0 hole 1.5 unplated: 1(0,-5) 1(0,5)
  round 2 hole 1.2: 1(0,0) 2(5,5) 3(5,-5) 4(5,2.5) 5(5,-2.5)
  silkscreen extent -6.5,-6 8,6, body extent -6.5,-5.9 8,5.9, height 10
8A51F738-712D-4EE5-9D6B-BB16603F834E [mm]
  rect 1.6x1.6 hole 0.92: 1(-3.5,1.271)
  round 1.6 hole 0.92: 2(-1,1.271) 3(1,1.271) 4(3.5,1.271)
  round 3.15 hole 2.3: 5(-6.57,-1.439) 6(6.57,-1.439)
  silkscreen extent -6.56,-11.72 6.57,3.38, body extent -8.12,-11.72 8.12,2.28, height 7.72
5394DE47-A0E8-4329-8464-7791B7C19310 [mm]
  silkscreen extent 0.02,0.02 15.9,6.02
34355DA5-B1DA-47C2-A88A-ECF82120A4F7 [mm] "SOIC, 14-Leads, Body 8.65x3.90mm, Pitch 1.27mm, IPC Medium Density"
  rect 1.45x0.6 smd: 1(-2.725,3.81) 2(-2.725,2.54) 3(-2.725,1.27) 4(-2.725,0) 5(-2.725,-1.27) 6(-2.725,-2.54) 7(-2.725,-3.81) 8(2.725,-3.81) 9(2.725,-2.54) 10(2.725,-1.27) 11(2.725,0) 12(2.725,1.27) 13(2.725,2.54) 14(2.725,3.81)
  silkscreen extent -2.85,-4.4 1.6,4.78, body extent -3,-4.4 3,4.4, height 1.75
"CAP 0603_1608" [mm] "Chip Capacitor, 2-Leads, Body 1.60x0.80mm, IPC Medium Density"
  rect 0.9x1 smd: 1(-0.675,0) 2(0.675,0)
  silkscreen extent -1.27,-0.7 1.27,0.7, body extent -0.8,-0.41 0.8,0.41, height 0.82
"CAP 0805_2012" [mm] "Chip Capacitor, 2-Leads, Body 2.00x1.20mm, IPC Medium Density"
  rect 1.3x1.4 smd: 1(-0.8,0) 2(0.8,0)
  silkscreen extent -1.7,-0.9 1.7,0.9, body extent -1,-0.64 1,0.64, height 1.26
ED49B4F6-595F-4D62-96BB-D7184CAA9B94 [mm]
  round 1.4 hole 0.889: 1(1.27,0)
  rect 1.4x1.4 hole 0.889: 2(-1.27,0)
  silkscreen extent -2.95,-2.95 2.95,2.95, body extent -2.92,-3.02 2.5,3, height 8.6
F0972D8A-C5C0-4A84-836D-A9666EE65C2D [mm]
  oval 1.65x3.85 hole 0.8 slot 3 at 90 deg: 1(0,0)
  oval 1.65x4.2 hole 0.8 slot 3.35 at 90 deg: 2(-6.2,0)
  oval 3.85x1.65 hole 0.8 slot 3 at 0 deg: 3(-2.95,-4.65)
  silkscreen extent -13.7,-4.5 0.5,4.5, body extent -13.67,-4.75 0.43,4.55, height 10.9
"FER 0603_1608" [mm] "Chip Ferrite, 2-Leads, Body 1.60x0.80mm, IPC Medium Density"
  rect 0.9x1 smd: 1(-0.675,0) 2(0.675,0)
  silkscreen extent -1.4,-0.7 1.4,0.7, body extent -0.8,-0.41 0.8,0.41, height 0.82
FIDUCIAL-IPC-7351A [mm]
  round 1 smd paste-2.54 mask+1: 5(0,0)
  Top Layer pour cut-out: 0,-1.5 -0.574,-1.386 -1.061,-1.061 -1.386,-0.574 -1.5,0 -1.5,0 -1.386,0.574 -1.061,1.061 -0.574,1.386 0,1.5 0,1.5 0.574,1.386 1.061,1.061 1.386,0.574 1.5,0 1.5,0 1.386,-0.574 1.061,-1.061 0.574,-1.386 0,-1.5
"RES 0603_1608" [mm] "Chip Resistor, 2-Leads, Body 1.60x0.80mm, IPC Medium Density"
  rect 0.85x0.95 smd: 1(-0.65,0) 2(0.65,0)
  silkscreen extent -1.27,-0.7 1.27,0.7, body extent -0.8,-0.4 0.8,0.4, height 0.45
"RES 1206_3216" [mm] "Chip Resistor, 2-Leads, Body 3.13x1.55mm, IPC Medium Density"
  rect 1.2x1.65 smd: 1(-1.4,0) 2(1.4,0)
  silkscreen extent -2.3,-1.1 2.3,1.1, body extent -1.58,-0.8 1.62,0.8, height 0.6
SOD523F [mm] "SODFL, 2-Leads, Body 0.80x1.60mm, IPC Medium Density"
  rect 0.8x0.5 smd: 1(0.9,0) 2(-0.9,0)
  silkscreen extent -1.6,-0.63 1.8,0.64, body extent -0.8,-0.4 0.8,0.4, height 0.65
SOD-123 [mm] "SOD, 2-Leads, Body 1.55x3.70mm, IPC Medium Density"
  rect 0.9x0.95 smd: 1(1.575,0) 2(-1.575,0)
  silkscreen extent -2.3,-0.92 2.41,0.92, body extent -1.86,-0.78 1.86,0.77, height 1.35

## Part data
C1A C1B C1C C1D C1E C1F C1G C1H C1I C1J C2A C2B C3A C3B: library part 02841f84-ac15-41b5-9e17-915f8f067828, "CAP SMD MLCC 100nF 25V 0603 X7R", Manufacturer 1="Samsung Electro-Mechanics", Manufacturer Part Number 1=CL10B104KA8NNNC, ComponentLink1Description=Datasheet, ComponentLink1URL=http://localhost:8080/static/files/Samsung-Electro-Mechanics-CL10B104KA8NNNC_C15902019-03-10_215548.826887.pdf?Samsung-Electro-Mechanics-CL10B104KA8NNNC_C1590.pdf, id=14784, Part Number=02841f84-ac15-41b5-9e17-915f8f067828, S 1=LCSC, SPN 1=C1590
C4A C4B C5A C5B C7A C7B C8 C9 C10 C12 C13: library part 1ffbe5a9-0884-4740-bdad-20a6a98400e6, "CAP SMD MLCC 10uF 25V 0805 X5R", Manufacturer 1="Samsung Electro-Mechanics", Manufacturer 2=Murata, Manufacturer Part Number 1=CL21A106KAYNNNE, Manufacturer Part Number 2=GRM21BR61E106KA73L, ComponentLink1Description=Datasheet, ComponentLink1URL=http://localhost:8080/static/files/Samsung-Electro-Mechanics-CL21A106KAYNNNE_C158502019-03-10_213827.610739.pdf?Samsung-Electro-Mechanics-CL21A106KAYNNNE_C15850.pdf, id=14779, Part Number=1ffbe5a9-0884-4740-bdad-20a6a98400e6, S 1=LCSC, S 2=LCSC, SPN 1=C84416, SPN 2=C15850
C6A C6B: library part 0eca2548-3630-4fea-a3d5-94248c1cae74, "CAP SMD MLCC 1nF 50V 0603 X7R", Manufacturer 1="Samsung Electro-Mechanics", Manufacturer Part Number 1=CL10B102KB8NNNC, ComponentLink1Description=Datasheet, ComponentLink1URL="http://localhost:8080/static/files/Samsung-Electro-Mechanics-CL10B102KB8NNNC_C1588_12019-03-10_215732.131818.pdf?Samsung-Electro-Mechanics-CL10B102KB8NNNC_C1588 (1).pdf", id=14785, Part Number=0eca2548-3630-4fea-a3d5-94248c1cae74, S 1=LCSC, SPN 1=C1588
D1A D1B D1C D1D D1E D1F D1G D1H D1I D1J D2A D2B D2C D2D D2E D2F D2G D2H D2I D2J D3A D3B D3C D3D D3E D3F D3G D3H D3I D3J D4A D4B D4C D4D D4E D4F D4G D4H D4I D4J D11: library part c65ae3d2-9539-4634-8979-616a331b7494, "DIODE LED THT 5MM RED 200mcd", Manufacturer 1=Everlight, Manufacturer Part Number 1=333-2SURD/S530-A3-L, ComponentLink1Description=Datasheet, ComponentLink1URL=http://localhost:8080/static/files/Everlight-Elec-333-2SURD-S530-A3-L_C997582019-08-18_181624.501044.pdf?Everlight-Elec-333-2SURD-S530-A3-L_C99758.pdf, id=14851, Part Number=c65ae3d2-9539-4634-8979-616a331b7494, S 1=LCSC, SPN 1=C99758
D5A D5B D6A D6B D9A D9B D10A D10B: library part 5e920700-75df-48e3-84dd-8f9f777caed8, "DIODE SMD 100V 150mA 1.5Vf SOD-123 4148", Manufacturer 1=MCC, ComponentLink1Description=Datasheet, ComponentLink1URL=http://localhost:8080/static/files/Micro-Commercial-Components-MCC-1N4148W-TP_C779782019-04-06_215019.428643.pdf?Micro-Commercial-Components-MCC-1N4148W-TP_C77978.pdf, id=14795, Manufacturer Part Number 1=1N4148W-TP, Part Number=5e920700-75df-48e3-84dd-8f9f777caed8, S 1=LCSC, SPN 1=C77978
D7A D7B: library part d6266fd0-7428-4fb9-a062-338cdce926fd, "DIODE SMD TVS 3.3V BIDIRECTIONAL SOD-523", Manufacturer 1="Born Semiconductor", Manufacturer 2=Nexperia, Manufacturer Part Number 1=PESD3V3S1BA-N, Manufacturer Part Number 2=PESD3V3S1UB,115, ComponentLink1Description=Datasheet, ComponentLink1URL=http://localhost:8080/static/files/Bourne-Semicon-Shenzhen-PESD3V3S1BA-N_C3160372019-04-07_002431.794112.pdf?Bourne-Semicon-Shenzhen-PESD3V3S1BA-N_C316037.pdf, ComponentLink2Description=Datasheet, ComponentLink2URL=http://localhost:8080/static/files/Nexperia-PESD3V3S1UB115-datasheet2019-08-16_201415.198759.pdf?Nexperia-PESD3V3S1UB,115-datasheet.pdf, id=14798, Part Number=d6266fd0-7428-4fb9-a062-338cdce926fd, S 1=LCSC, S 2=LCSC, SPN 1=C85377, SPN 2=C316037
D8A D8B: library part daa58212-38e2-4326-a156-8e48058c46f1, "DIODE SMD TVS 5V BIDIRECTIONAL SOD-523", Manufacturer 1="Born Semiconductor", Manufacturer 2=Nexperia, Manufacturer Part Number 1=PESD5V0S1BBN, Manufacturer Part Number 2=PESD5V0S1BB,115, ComponentLink1Description=Datasheet, ComponentLink1URL=http://localhost:8080/static/files/Nexperia-PESD5V0S1BB-115_C976402019-08-16_201905.624024.pdf?Nexperia-PESD5V0S1BB-115_C97640.pdf, ComponentLink2Description=Datasheet, ComponentLink2URL=http://localhost:8080/static/files/1901051701_Bourne-Semicon-Shenzhen-PESD5V0S1BBN_C3142642019-08-16_201911.992552.pdf?1901051701_Bourne-Semicon-Shenzhen-PESD5V0S1BBN_C314264.pdf, id=14837, Part Number=daa58212-38e2-4326-a156-8e48058c46f1, S 1=LCSC, S 2=LCSC, SPN 1=C97640, SPN 2=C314264
FD1 FD2 FD3: library part 19da4612-eb95-43bb-9984-553a52b2a224, "GRAPHICS FIDUCIAL IPC-7351A", id=14800, Part Number=19da4612-eb95-43bb-9984-553a52b2a224
GR1: library part 50f8ea88-0034-49fe-a263-d8e97bc35e2f, "GRAPHICS LOGO FERMIUM LABS SRL", id=14799, Part Number=50f8ea88-0034-49fe-a263-d8e97bc35e2f
L1 L2: library part a4b2e015-bf25-47b8-954c-a5b040744a3a, "FER SMD CHIP 0603 800mA 1K@100MHz 300mOhm", Manufacturer 1=TDK, ComponentLink1Description=Datasheet, ComponentLink1URL=http://localhost:8080/static/files/TDK-MPZ1608S102ATA00_C768142019-08-18_021255.210641.pdf?TDK-MPZ1608S102ATA00_C76814.pdf, id=14850, Manufacturer Part Number 1=MPZ1608S102ATA00, Part Number=a4b2e015-bf25-47b8-954c-a5b040744a3a, S 1=LCSC, SPN 1=C76814
P1: library part b53db51a-1725-412b-9039-fa7a45c7c438, "CONN THT DC JACK 0.5A 30VDC 5Kcycles", Manufacturer 1="HRO Electronics", ComponentLink1Description=Datasheet, ComponentLink1URL="http://localhost:8080/static/files/Korean-Hroparts-Elec-DC-005A-20A_C191049_22019-03-10_214231.486078.pdf?Korean-Hroparts-Elec-DC-005A-20A_C191049 (2).pdf", id=14780, Manufacturer Part Number 1=DC-005A-20A, Part Number=b53db51a-1725-412b-9039-fa7a45c7c438, S 1=LCSC, SPN 1=C191049
P2: library part 9ff2a560-e541-4da0-adda-013cc9c65511, "CONN THT USB TYPE-A HIGH RELIABILITY", Manufacturer 1="TE Connectivity", ComponentLink1Description=Datasheet, ComponentLink1URL=http://localhost:8080/static/files/TE_Connectivity-292303-1-datasheet2019-08-25_172711.777436.pdf?TE_Connectivity-292303-1-datasheet.pdf, id=14855, Manufacturer Part Number 1=292303-1, Part Number=9ff2a560-e541-4da0-adda-013cc9c65511, S 1=LCSC, SPN 1=C86461
P3 P4 P5: library part 80507a24-5d7c-4cf5-953e-f54832d54564, "CONN THT 3.5mm AUDIO STEREO AUX SWITCH", Manufacturer 1="HRO Electronics", ComponentLink1Description=Datasheet, ComponentLink1URL=http://localhost:8080/static/files/Korean-Hroparts-Elec-PJ-3900-04_C1518392019-04-10_231144.687617.pdf?Korean-Hroparts-Elec-PJ-3900-04_C151839.pdf, id=14793, Manufacturer Part Number 1=PJ-3900-04, Part Number=80507a24-5d7c-4cf5-953e-f54832d54564, S 1=LCSC, SPN 1=C151839
R1A R1B R1C R1D R1E R1F R1G R1H R1I R1J R3A R3B R3C R3D R3E R3F R3G R3H R3I R3J R5A R5B R5C R5D R5E R5F R5G R5H R5I R5J R7A R7B R7C R7D R7E R7F R7G R7H R7I R7J R11A R11B R16A R16B R22A R22B R23A R23B R29A R29B R31A R31B: library part a678220f-9e9d-4863-a833-9993504f723c, "RES SMD 1K OHM 1% 1/10W 0603", Manufacturer 1=Yageo, Manufacturer Part Number 1=RC0603FR-071KL, id=14794, Part Number=a678220f-9e9d-4863-a833-9993504f723c, S 1=LCSC, SPN 1=C22548
R2A R2B R2C R2D R2E R2F R2G R2H R2I R2J R4A R4B R4C R4D R4E R4F R4G R4H R4I R4J R6A R6B R6C R6D R6E R6F R6G R6H R6I R6J R8A R8B R8C R8D R8E R8F R8G R8H R8I R8J R32: library part c8bf8de8-3430-48dd-94ac-a027709c0c4f, "RES SMD 499 OHM 1% 1/4W 1206", Manufacturer 1=Yageo, Manufacturer Part Number 1=RC1206FR-07499RL, id=14010, Part Number=c8bf8de8-3430-48dd-94ac-a027709c0c4f, S 1=LCSC, SPN 1=C137267
R9A R9B R12A R12B R18A R18B R20A R20B R30A R30B: library part 76af10b3-9d85-4b5c-a2d6-26cc74f432f7, "RES SMD 100K OHM 1% 1/10W 0603", Manufacturer 1=Yageo, Manufacturer Part Number 1=RC0603FR-07100KL, id=12746, Part Number=76af10b3-9d85-4b5c-a2d6-26cc74f432f7, S 1=LCSC, SPN 1=C14675
R10A R10B R14A R14B R15A R15B R19A R19B R24A R24B R26A R26B R27A R27B: library part 93242766-ba1d-462d-b58f-ce1dfc4129c8, "RES SMD 10K OHM 1% 1/10W 0603", Manufacturer 1=Yageo, Manufacturer Part Number 1=RC0603FR-0710KL, id=12101, Part Number=93242766-ba1d-462d-b58f-ce1dfc4129c8, S 1=LCSC, SPN 1=C98220
R13A R13B R17A R17B R25A R25B R28A R28B: library part 6ae227f9-847f-4766-8522-e11a83531204, "RES SMD 0 OHM 5% 1/10W 0603", Manufacturer 1=Yageo, Manufacturer Part Number 1=RC0603JR-070RL, id=11973, Part Number=6ae227f9-847f-4766-8522-e11a83531204, S 1=LCSC, SPN 1=C95177
R21A R21B: library part 3df905ea-1e80-4add-859d-a36edd7f106c, "POT 10K 20% SHAFT 6mmx7.4mm LIN", Manufacturer 1=ALPS, Manufacturer Part Number 1=RK09K1130A6S, ComponentLink1Description="3D Model", ComponentLink1URL=http://localhost:8080/static/files/RK09K1130A6S2019-08-17_031625.830758.zip?RK09K1130A6S.zip, ComponentLink2Description=Datasheet, ComponentLink2URL=http://localhost:8080/static/files/ALPS-Electric-RK09K1130A6S_C2097702019-08-17_031651.036431.pdf?ALPS-Electric-RK09K1130A6S_C209770.pdf, id=14828, Part Number=3df905ea-1e80-4add-859d-a36edd7f106c, S 1=LCSC, SPN 1=C209770
U1A U1B U1C U1D U1E U1F U1G U1H U1I U1J U2A U2B U3A U3B: library part 21a85167-c328-42f7-a52e-365842c6dad3, "IC SMD OPAMP LM324DT SO-14", Manufacturer 1="ST Microelectronics", ComponentLink1Description=Datasheet, ComponentLink1URL=http://localhost:8080/static/files/STMicroelectronics-LM324DT_C710352019-04-06_191500.254110.pdf?STMicroelectronics-LM324DT_C71035.pdf, id=14792, Manufacturer Part Number 1=LM324DT, Part Number=21a85167-c328-42f7-a52e-365842c6dad3, S 1=LCSC, SPN 1=C71035
U4 U6: library part 446536aa-1bdd-4764-8cae-49f4e0c126ff, "IC SMD LINEAR VOLTAGE REGULATOR 5V 500mA DPAK/TO-252", Manufacturer 1="ST Microelectronics", ComponentLink1Description=Datasheet, ComponentLink1URL=http://localhost:8080/static/files/STMicroelectronics-L78M05ABDT-TR_C580692019-08-17_184424.026041.pdf?STMicroelectronics-L78M05ABDT-TR_C58069.pdf, id=14848, Manufacturer Part Number 1=L78M05ABDT-TR, Part Number=446536aa-1bdd-4764-8cae-49f4e0c126ff, S 1=LCSC, SPN 1=C58069

## Free pads (board coordinates)
  round 5.5 hole 3.5: 0(4,4) 0(4,50) 0(11,90) 0(11,175) 0(69,90) 0(69,175) 0(76,4) 0(76,50)

## Via types
v1: diameter 0.7, hole 0.35, Top Layer to Bottom Layer, tented both sides, 121 vias

## Nets (pads, with @x,y where several pads share a name; then routed paths per layer and width w, separated by ;. In a path a pad name is that pad's centre, name@x,y a point inside that pad or via, vN(x,y) a via of type N, cw(c..) or ccw(c..) an arc to the next point about the centre after c; other vN are vias at no path point)
+5V: C5A.2 C5B.2 C10.1 R1A.1 R1F.1 R11A.2 R11B.2 R13A.1 R13B.1 R14A.1 R14B.1 R18A.1 R18B.1 R28A.1 R28B.1 U2A.3 U2A.10 U2A.12 U2B.3 U2B.10 U2B.12 U3A.5 U3B.5 U4.3 | length 15.5
  Top Layer w0.203: v1(31.666,43.714) R28A.1@31.666,44.974 ; v1(32.936,36.856) R11A.2@32.936,37.984 ; R1A.1@35.438,191.128 v1(35.438,192.256) ; v1(35.984,40.666) U2A.3@37.323,40.666 ; v1(37,43.968) R13A.1@37,44.974 ; v1(41.318,40.666) U2A.12@42.773,40.666 ; v1(41.572,38.126) U2A.10@42.773,38.126 ; C5A.2@46.906,41.898 48.788,41.898 R18A.1@48.938,42.048 48.938,41.598 v1(48.43,41.09) ; R14A.1@56.05,39 56.55,39 57.17,38.38 U3A.5@58.405,38.38 ; R1F.1@60.438,191.128 v1(60.438,192.256)